# EAGLE board stepperDriverBottom (EAGLE 9.6.2)
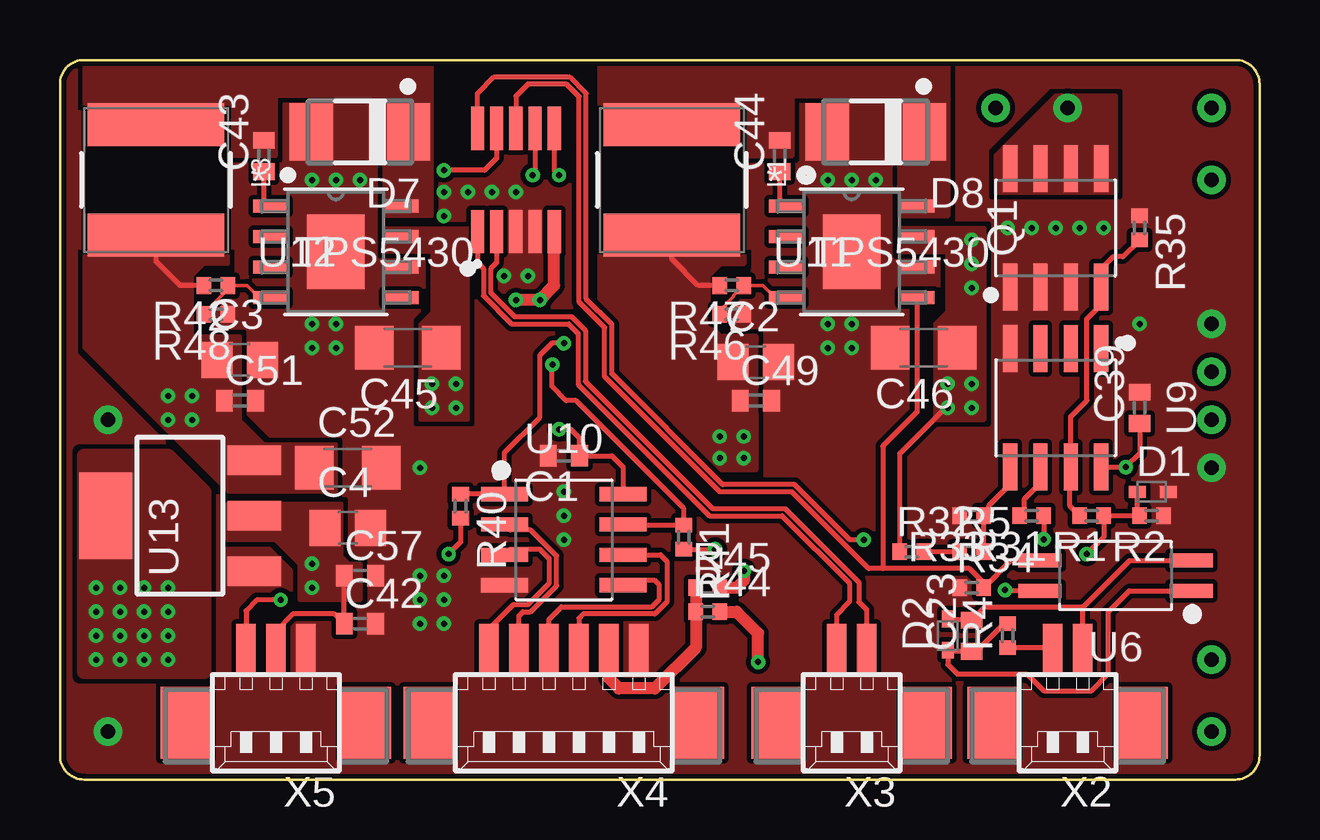
[diagram p0: board, top side]
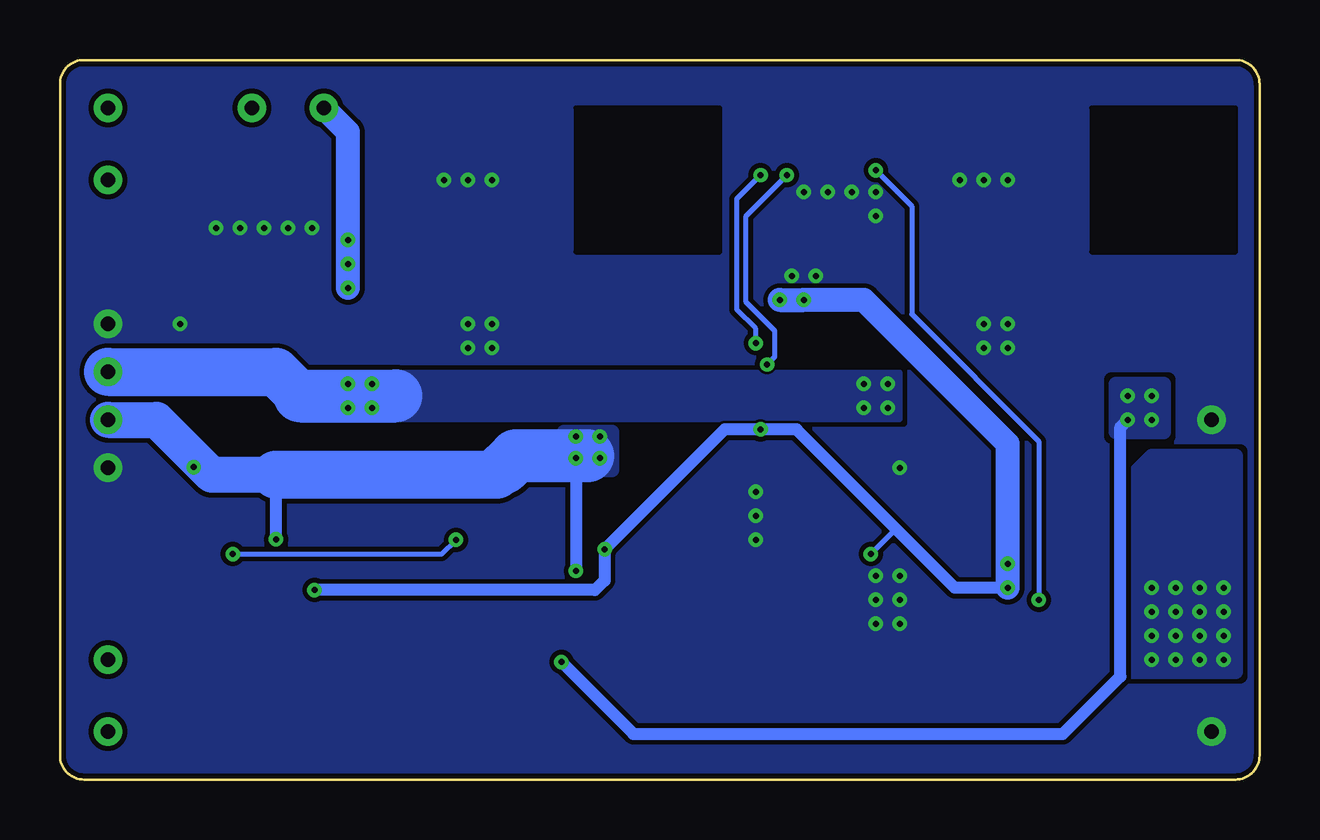
[diagram p1: board, bottom side, seen from below]

Size 50 x 30 mm. Coordinates in mm from the lower left corner, seen from the top.
Outline: 0,1 arc90 1,0 49,0 arc90 50,1 50,29 arc90 49,30 1,30 arc90 0,29 0,1
Copper layers (1+2*15+16): Top 0.035mm / dielectric 0.2mm / Route2 0.0175mm / dielectric 0.465mm / Route15 0.0175mm / dielectric 0.2mm / Bottom 0.035mm
Design rules "JLC4LayerRules *": minimum track width 0.1mm, minimum drill 0.2mm, track to track 0.1mm, track to pad 0.2mm, pad to pad 0.128mm, via to via 0.29mm, smd to smd 0mil, copper to edge 0.2mm, drill to drill 0.2mm, minimum pad ring 0.15mm, minimum via ring 0.15mm, stop-mask expansion 4mil, vias tented up to drill 0.25mm, thermal gap 10mil
Net classes: 1 diff pairs: width 0.089 mm, clearance 0.089 mm

## Footprints (pad centres in the part's own frame; a part is rotated, then mirrored left to right if it is on the bottom)
C0402 = smd 0.7 x 0.9: 1 -0.65,0; 2 0.65,0
C0805 = smd 1.3 x 1.5: 1 -0.95,0; 2 0.95,0
C1206 = smd 1.6 x 1.8: 1 -1.4,0; 2 1.4,0
SOD523 = smd 0.7 x 0.5: A 0.7,0; C -0.6,0
DO-214AC = smd 1.8 x 2.4: A 2.025,0; C -2.025,0
WE-LQS_6028 = smd 1.8 x 5.7: 1 -2.3,0; 2 2.3,0
SOIC127P600X175-8N = smd 1.968 x 0.602: 1 -2.473,1.905; 2 -2.473,0.635; 3 -2.473,-0.635; 4 -2.473,-1.905; 5 2.473,-1.905; 6 2.473,-0.635; 7 2.473,0.635; 8 2.473,1.905
R0402 = smd 0.6 x 0.7: 1 -0.5,0; 2 0.5,0
SOIC127P700X210-4N = smd 1.798 x 0.589: 1 -3.155,0.635; 2 -3.155,-0.635; 3 3.155,-0.635; 4 3.155,0.635
DDA8_3P1X2P4 = smd 1.455 x 0.533: 1 -2.721,1.905; 2 -2.721,0.635; 3 -2.721,-0.635; 4 -2.721,-1.905; 5 2.721,-1.905; 6 2.721,-0.635; 7 2.721,0.635; 8 2.721,1.905 | smd 2.4 x 3.1: EPAD 0,0
SOT223 = smd 1.219 x 2.235: 1 -2.311,-3.099; 2 0,-3.099; 3 2.311,-3.099 | smd 3.6 x 2.2: 4 0,3.099
533071071 = smd 0.55 x 1.8: 1 1.6,2.15; 2 0.8,2.15; 3 0,2.15; 4 -0.8,2.15; 5 -1.6,2.15; 6 1.6,-2.15; 7 0.8,-2.15; 8 0,-2.15; 9 -0.8,-2.15; 10 -1.6,-2.15
53261-02 = smd 0.8 x 2: 1 0.625,-2.5; 2 -0.625,-2.5 | smd 2.1 x 3: S1 3.125,0.625; S2 -3.125,0.625
53261-06 = smd 0.8 x 2: 1 3.125,-2.5; 2 1.875,-2.5; 3 0.625,-2.5; 4 -0.625,-2.5; 5 -1.875,-2.5; 6 -3.125,-2.5 | smd 2.1 x 3: S1 5.625,0.625; S2 -5.625,0.625
53261-03 = smd 0.8 x 2: 1 1.25,-2.5; 2 0,-2.5; 3 -1.25,-2.5 | smd 2.1 x 3: S1 3.75,0.625; S2 -3.75,0.625
3128-1 = drill 0.61 pad 1.2: PIN1 0,0

## Placement (x,y rotation side)
C1  100nF  [C0402]  21,13.5 180 top
C2  22uF 25V  [C0805]  29,17.4 0 top
C3  22uF 25V  [C0805]  7.5,17.5 0 top
C4  22uF 25V  [C0805]  12,10.5 0 top
C23  100nF  [C0402]  38,6 90 top
C39  100nF  [C0402]  45,15.5 90 top
C42  100nF  [C0402]  12.5,6.5 0 top
C43  10nF  [C0402]  8.5,26 90 top
C44  10nF  [C0402]  30,26 90 top
C45  10uF  [C1206]  14.5,18 180 top
C46  10uF  [C1206]  36,18 180 top
C49  100nF  [C0402]  29,15.8 0 top
C51  100nF  [C0402]  7.5,15.8 0 top
C52  10uF  [C1206]  12,13 0 top
C57  100nF  [C0402]  12.5,8.5 0 top
D1  ESD5Z3V3  [SOD523]  45.5,12 0 top
D2  ESD5Z3V3  [SOD523]  37,6 90 top
D7  SK14  [DO-214AC]  12.5,27 180 top
D8  SK14  [DO-214AC]  34,27 180 top
L1  100uH  [WE-LQS_6028]  25.5,25 270 top
L3  100uH  [WE-LQS_6028]  4,25 270 top
Q1  AO4292E  [SOIC127P600X175-8N]  41.5,23 90 top
R1  10k  [R0402]  43,11 180 top
R2  1k  [R0402]  45.5,11 180 top
R4  1k  [R0402]  39.5,6 90 top
R5  1k  [R0402]  38,9.5 0 top
R31  10k  [R0402]  40.5,11 180 top
R32  10k  [R0402]  35.5,9.5 0 top
R33  10k  [R0402]  38,11 180 top
R34  1k  [R0402]  38,8 0 top
R35  10k  [R0402]  45,23 270 top
R40  10k  [R0402]  16.7,11.4 270 top
R41  10k  [R0402]  26,10.1 270 top
R42  10k  [R0402]  6.5,20.6 180 top
R44  0Ohm  [R0402]  27,7 0 top
R45  0Ohm  [R0402]  27,8 0 top
R46  1.13k  [R0402]  28,19.4 180 top
R47  10k  [R0402]  28,20.6 180 top
R48  3.24k  [R0402]  6.5,19.4 180 top
U6  TLP291  [SOIC127P700X210-4N]  44,8.5 180 top
U9  LM393DR2G  [SOIC127P600X175-8N]  41.5,15.5 270 top
U10  LM393DR2G  [SOIC127P600X175-8N]  21,10 0 top
U11  TPS5430  [DDA8_3P1X2P4]  33,22 0 top
U12  TPS5430  [DDA8_3P1X2P4]  11.5,22 0 top
U13  AMS1117-3.3  [SOT223]  5,11 90 top
X1  533071071  [533071071]  19,25 180 top
X2  53261-02  [53261-02]  42,3 180 top
X3  53261-02  [53261-02]  33,3 180 top
X4  53261-06  [53261-06]  21,3 180 top
X5  53261-03  [53261-03]  9,3 180 top
X6  3128-1  [3128-1]  48,2 0 top
X7  3128-1  [3128-1]  48,5 0 top
X8  3128-1  [3128-1]  48,25 0 top
X9  3128-1  [3128-1]  48,28 0 top
X10  3128-1  [3128-1]  48,17 0 top
X11  3128-1  [3128-1]  48,13 0 top
X12  3128-1  [3128-1]  2,2 0 top
X13  3128-1  [3128-1]  2,15 0 top
X14  3128-1  [3128-1]  39,28 0 top
X15  3128-1  [3128-1]  42,28 0 top
X16  3128-1  [3128-1]  48,15 0 top
X17  3128-1  [3128-1]  48,19 0 top

## Library data of the parts
C1-C4 C23 C39 C42-C46 C49 C51 C52 C57 = rcl; SPICEPREFIX: C
D1 D2 D7 D8 = diode
L1 L3 = Wurth_Power Magnetics_WE-LQS; DATASHEET-URL: https://www.we-online.com/catalog/datasheet/74404063101.pdf; FRES: 8.8MHz; IR: 0.7A; ISAT: 0.71A; PART-NUMBER: 74404063101; RDC: 500mOhm
Q1 U6 U9 U10 U13 = stepperDriver
R1 R2 R4 R5 R31-R35 R40-R42 R44-R48 = rcl; SPICEPREFIX: R
U11 U12 = stepperDriver; DATASHEET_URL: http://www.ti.com/lit/gpn/TPS5430; DESCRIPTION: 5.5V to 36V Input, 3A, 500kHz Step-Down Converter; FAMILY_NAME: STEP-DOWN REGULATOR; GENERIC_PART_NUMBER: TPS5430; INDUSTRY_STD_PKG_TYPE: SO PowerPAD; MANUFACTURER: Texas Instruments; MANUFACTURER_PART_NUMBER: TPS5430DDA; PACKAGE_DESIGNATOR: DDA; PIN_COUNT: 8; VENDOR: Texas Instruments
X1 X6-X17 = connectors
X2 X3 = connectors; MF: MOLEX; OC_FARNELL: 1125373; OC_NEWARK: unknown
X4 = connectors; MF: MOLEX; OC_FARNELL: 1125375; OC_NEWARK: unknown
X5 = connectors; MF: MOLEX; MPN: 53261-0390; OC_FARNELL: 1125359; OC_NEWARK: 57H5006

## Nets
+3V3: C1.1 C4.1 C42.1 C57.1 R40.2 R41.2 U6.4 U10.8 U13.2 X1.5 X5.2
+5V0: C3.1 C51.1 C52.1 L3.2 R42.2 R44.2 U13.3
+12V0: C2.1 C39.1 C49.1 L1.2 R31.1 R45.2 R47.2 U9.8 X16.PIN1
+24V0: C45.1 C46.1 R32.1 U11.7 U12.7 X10.PIN1 X14.PIN1
BOOT5: C43.1 U12.1
BOOT12: C44.1 U11.1
BRAKE_EN: Q1.4 R1.2 R35.2 U9.7
BRAKE_MON: D1.C R1.1 R2.2 X1.6
CAN_N: X1.2 X3.2
CAN_P: X1.1 X3.1
ENABLE_5V: U12.5
ENC_A: R40.1 U10.1 X1.10
ENC_A+: U10.3 X4.1
ENC_A-: U10.2 X4.2
ENC_B: R41.1 U10.7 X1.9
ENC_B+: U10.5 X4.3
ENC_B-: U10.6 X4.4
ENC_V+: R44.1 R45.1 X4.5
EPAD: U13.4
GND: C1.2 C2.2 C3.2 C4.2 C39.2 C42.2 C45.2 C46.2 C49.2 C51.2 C52.2 C57.2 D1.A D7.A D8.A Q1.1 Q1.2 Q1.3 R2.1 R33.2 R34.1 R35.1 R46.1 R48.1 U9.4 U10.4 U11.6 U11.EPAD U12.6 U12.EPAD U13.1 X1.3 X1.4 X4.6 X5.3 X11.PIN1 X12.PIN1 X13.PIN1 X17.PIN1
HOME: X1.7 X5.1
INB+: R5.2 R33.1 U9.5
N$1: R5.1 R32.2
N$2: R31.2 U9.6
N$14: C44.2 D8.C L1.1 U11.8
N$15: C43.2 D7.C L3.1 U12.8
OUT_A_W: X6.PIN1
OUT_B: X7.PIN1
OUT_C: X8.PIN1
OUT_D_W: X9.PIN1
R-: Q1.5 Q1.6 Q1.7 Q1.8 X15.PIN1
STO1+: R4.1 X2.1
STO1+_LED: C23.1 D2.C R4.2 U6.1
STO1-: C23.2 D2.A U6.2 X2.2
STO_IN: R34.2 U6.3 U11.5 X1.8
VFB_+5V0: R42.1 R48.2 U12.4
VFB_+12V0: R46.2 R47.1 U11.4

## Tracks (layer width: path | path; a pad name or v marks a point on that pad's centre or on a via)
+3V3  (via drill 0.25 pad 0.6)
  Top 0.2: C57.1 C42.1 11.45,6.9 9.7,6.9 9,6.2 X5.2 | v20.8,14.6 21.3,14.6 21.65,14.25 C1.1 23,13.5 23.47,13.03 U10.8 | U6.4 39.42,7.87 v39.39,7.9 | R41.2 v27.3,9.6 | R40.2 16.7,9.9 v16.2,9.4
  Top 0.5: X1.5 20.6,20.6 v20,20 v19,20
  Bottom 0.2: v16.2,9.4 15.2,10.4 15.2,10.5
  Bottom 0.5: v10.5,8 12.7,8 15.2,10.5 19.3,14.6 v20.8,14.6 22.3,14.6 v27.3,9.6 27.3,8.3 27.7,7.9 v39.39,7.9
  Bottom 1: v10.5,8 v10.5,9 10.5,14 16.5,20 v19,20 v20,20
  pour Top (no thermals): 7,11.5 11.7,11.5 11.7,9.3 12,9 12.5,9 12.5,7.5 10,7.5 10,9 9,10 7,10
+5V0  (via drill 0.25 pad 0.6)
  Top 0.2: R42.2 5,20.6 4,21.6 L3.2
  Top 0.5: v29.1,4.9 29.1,6.1 28.2,7 R44.2
  Bottom 0.5: v29.1,4.9 26.1,1.9 8.2,1.9 5.8,4.3 5.8,14.7 v5.5,15
  other vias: 5.5,16 4.5,16 4.5,15
  pour Top (no thermals): 1,23.5 7,23.5 7,21.5 6,21.5 5.5,21 5.5,18.5 7.5,18.5 7.5,15 8.5,14 11.5,14 11.5,12 7,12 1,18
  pour Bottom (no thermals): 4,16.5 4,14.5 6,14.5 6,16.5
+12V0  (via drill 0.25 pad 0.6)
  Top 0.2: R31.1 v41,10.02 | C39.1 45,13.6 v44.43,13.03 U9.8 | R47.2 26.6,20.6 25.5,21.7 L1.2
  Top 0.5: v28.5,8.7 28.5,8.3 28.2,8 R45.2
  Bottom 0.5: v41,10.02 41,12.7 | v28.5,13.4 v28.5,8.7 | v44.43,13.03 44.4,13 43.97,13
  Bottom 1.5: X16.PIN1 45.97,15 43.97,13 43.67,12.7 41,12.7
  Bottom 2: 31.5,13 31.8,12.7 41,12.7
  Bottom 2.2: 31.5,13 31,13.5 28,13.5
  other vias: 27.5,13.4 28.5,14.3 27.5,14.3
  pour Top (isolate 0.2, no thermals): 22.5,23.5 28.5,23.5 28.5,21.5 27.5,21.5 27,21 27,19 27.5,18.5 29,18.5 29,12.9 27.3,12.9 22.5,17.7
  pour Bottom (no thermals): 27,14.5 29,14.5 29,12.9 27,12.9
+24V0  (via drill 0.25 pad 0.6)
  Top 0.2: R32.1 35,11.4 35,13.6 36.9,15.5 v37,15.5
  Bottom 1: v38,20.5 v38,21.5 v38,22.5 38,27 X14.PIN1
  Bottom 2: X10.PIN1 41,17 40,16
  Bottom 2.2: 40,16 36,16
  other vias: 37,16.5 38,16.5 38,15.5 15.5,16.5 16.5,16.5 16.5,15.5 15.5,15.5
  pour Top (no thermals): 35,23 38.5,23 38.5,15 36.5,15 36.5,19 37,19.5 37,22 35,22
  pour Top (no thermals): 15,15 17,15 17,23 13.5,23 13.5,22 15.5,22 15.5,19.5 15,19
  pour Bottom (no thermals): 15,17 15,15 38.5,15 38.5,17
BOOT5
  Top 0.2: U12.1 8.5,24.18 C43.1
BOOT12
  Top 0.2: U11.1 30,24.18 C44.1
BRAKE_EN
  Top 0.2: U9.7 42.13,13.2 | 42.13,13.2 42.13,15.13 42.8,15.8 42.8,19.2 43.41,19.8 Q1.4 43.41,21.3 43.9,21.8 44.3,21.8 R35.2 | R1.2 42.1,11.4 42.1,13.16 42.13,13.2
BRAKE_MON  (via drill 0.25 pad 0.6)
  Top 0.2: D1.C 44.9,11.1 R2.2 R1.1 43.5,10.1 v42.8,9.4 | v33.5,10 32.92,10 30.62,12.3 27.62,12.3 23,16.92 23,18.97 21.94,20.04 21.94,28.6 21.24,29.3 18.1,29.3 17.4,28.6 X1.6
  Bottom 0.2: v42.8,9.4 34.1,9.4 v33.5,10
CAN_N
  Top 0.2: X1.2 18.2,21.55 17.95,21.3 17.95,20.3 18.95,19.3 21.32,19.3 21.9,18.72 21.9,16.6 27.2,11.3 30.22,11.3 33.3,8.22 33.3,7.4 33.62,7.08 X3.2
CAN_P
  Top 0.2: X1.1 17.4,21.55 17.65,21.3 17.65,20.18 18.83,19 21.2,19 21.6,18.6 21.6,16.48 27.08,11 30.1,11 32.9,8.2 32.9,7.4 32.38,6.88 X3.1
ENC_A  (via drill 0.25 pad 0.6)
  Top 0.2: R40.1 U10.1 18.53,13.63 20,15.1 20,17.69 20.5,18.19 v21,18.19 | X1.10 20.6,25.4 v20.8,25.2
  Bottom 0.2: v20.8,25.2 21.8,24.2 21.8,19.6 21,18.8 v21,18.19
ENC_A+
  Top 0.2: X4.1 17.88,6.28 18.9,7.3 19.5,7.3 20.4,8.2 20.4,9.2 20,9.6 18.76,9.6 U10.3
ENC_A-
  Top 0.2: X4.2 19.12,6.83 19.3,7 19.62,7 20.7,8.08 20.7,9.32 19.62,10.4 18.76,10.4 U10.2
ENC_B  (via drill 0.25 pad 0.6)
  Top 0.2: U10.7 23.51,10.6 R41.1 26,11.3 21.5,15.8 21.1,15.8 20.5,16.4 20.5,17.3 v20.53,17.3 | X1.9 19.8,25.3 v19.7,25.2
  Bottom 0.2: v20.53,17.3 20.2,17.63 20.2,18.7 21.4,19.9 21.4,23.5 v19.7,25.2
ENC_B+
  Top 0.2: X4.3 20.38,6.67 20.9,7.2 24.68,7.2 24.99,7.51 24.99,8.11 24.8,8.3 23.68,8.3 U10.5
ENC_B-
  Top 0.2: U10.6 25.04,9.37 25.3,9.1 25.3,7.4 24.8,6.9 21.8,6.9 21.62,6.72 X4.4
ENC_V+
  Top 0.5: R45.1 R44.1 26.5,5.5 24.8,3.8 23.3,3.8 22.88,4.22 X4.5
EPAD  (via drill 0.25 pad 0.6)
  other vias: 1.5,8 1.5,7 1.5,6 1.5,5 2.5,5 3.5,5 4.5,5 4.5,6 4.5,7 4.5,8 3.5,6 2.5,6 2.5,7 3.5,7 3.5,8 2.5,8
  pour Top (no thermals): 1,13.5 4.5,13.5 6,12 6,4.5 1,4.5
  pour Bottom (isolate 0.2, no thermals): 1,13.5 4.5,13.5 5.5,12.5 5.5,4.5 1,4.5
GND  (via drill 0.25 pad 0.6)
  other vias: 16,23.5 16,24.5 17,24.5 18,24.5 19,24.5 18.5,21 19.5,21 21,10 21,11 21,12 15,6.5 15,8.5 15,13 16,6.5 16,7.5 15,7.5 16,8.5 39.5,23 40.5,23 41.5,23 42.5,23 43.5,23 32,25 33,25 34,25 33,18 33,19 32,19 32,18 11.5,19 11.5,18 10.5,18 10.5,19 11.5,25 10.5,25 12.5,25 45,19
  pour Top (isolate 0.2, rank 6, no thermals): 0,0 0,30 50,30 50,0
  pour Bottom (isolate 0.2, rank 6, no thermals): 0,0 0,30 50,30 50,0
  cutout Top (no thermals): 1,28 7,28 7,22 1,22
  cutout Bottom (no thermals): 1,22 1,28 7,28 7,22
  cutout Bottom (no thermals): 22.5,22 22.5,28 28.5,28 28.5,22
  cutout Top (no thermals): 22.5,22 22.5,28 28.5,28 28.5,22
HOME  (via drill 0.25 pad 0.6)
  Top 0.2: X1.7 18.2,25.9 17.7,25.4 v16,25.4 | v9.2,7.49 8.2,7.49 7.75,7.04 X5.1
  Bottom 0.2: v16,25.4 14.5,23.9 14.5,19.4 9.2,14.1 v9.2,7.49
INB+
  Top 0.2: U9.5 39.59,12.29 38.7,11.4 38.7,11.2 R33.1 R5.2
N$1
  Top 0.2: R5.1 R32.2
N$2
  Top 0.2: R31.2 40.2,11.2 40.2,11.7 40.87,12.37 U9.6
N$14
  pour Top (no thermals): 35,23.5 35,28.5 37,28.5 37,23.5
  pour Top (no thermals): 30.5,26 22.5,26 22.5,30 37,30 37,28 35,28 34.5,28.5 30.5,28.5
N$15
  pour Top (no thermals): 13.5,23.5 15.5,23.5 15.5,30 1,30 1,26 9,26 9,28.5 13,28.5 13.5,28
R-
  pour Top (no thermals): 39,24.5 44,24.5 44,28.5 41.5,28.5 39,26
STO1+
  Top 0.2: X2.1 R4.1
STO1+_LED
  Top 0.2: R4.2 39.35,6.5 38.2,5.35 C23.1 37.05,5.35 D2.C 37,4.8 37.4,4.4 40.3,4.4 41,3.7 43,3.7 43.7,4.4 43.7,7 44.56,7.87 U6.1
STO1-
  Top 0.2: D2.A 37.05,6.65 C23.2 38.55,7.2 42.6,7.2 42.62,7.17 | X2.2 42.62,7.17 | 42.62,7.17 44.59,9.13 U6.2
STO_IN
  Top 0.2: U6.3 39.63,9.13 R34.2 38.5,8.2 37.9,8.8 34.3,8.8 | 34.3,8.8 33.7,8.8 30.5,12 27.5,12 22.7,16.8 22.7,18.85 21.64,19.91 21.64,28.48 21.11,29 19.5,29 19,28.5 X1.8 | U11.5 35.72,15.32 34.3,13.9 34.3,8.8
VFB_+5V0
  Top 0.15: R48.2 6.42,19.82 6.42,19.86 7,20.44 R42.1 7.8,20.6 8.3,20.09 U12.4
  Top 0.2: U12.4 8.21,20.09
VFB_+12V0
  Top 0.15: 27.5,19.5 R46.2 27.5,19.56 28.07,20.14 28.07,20.18 R47.1 29.3,20.6 29.8,20.09 U11.4